# EAGLE board Clock_BUS (EAGLE 9.3.2)
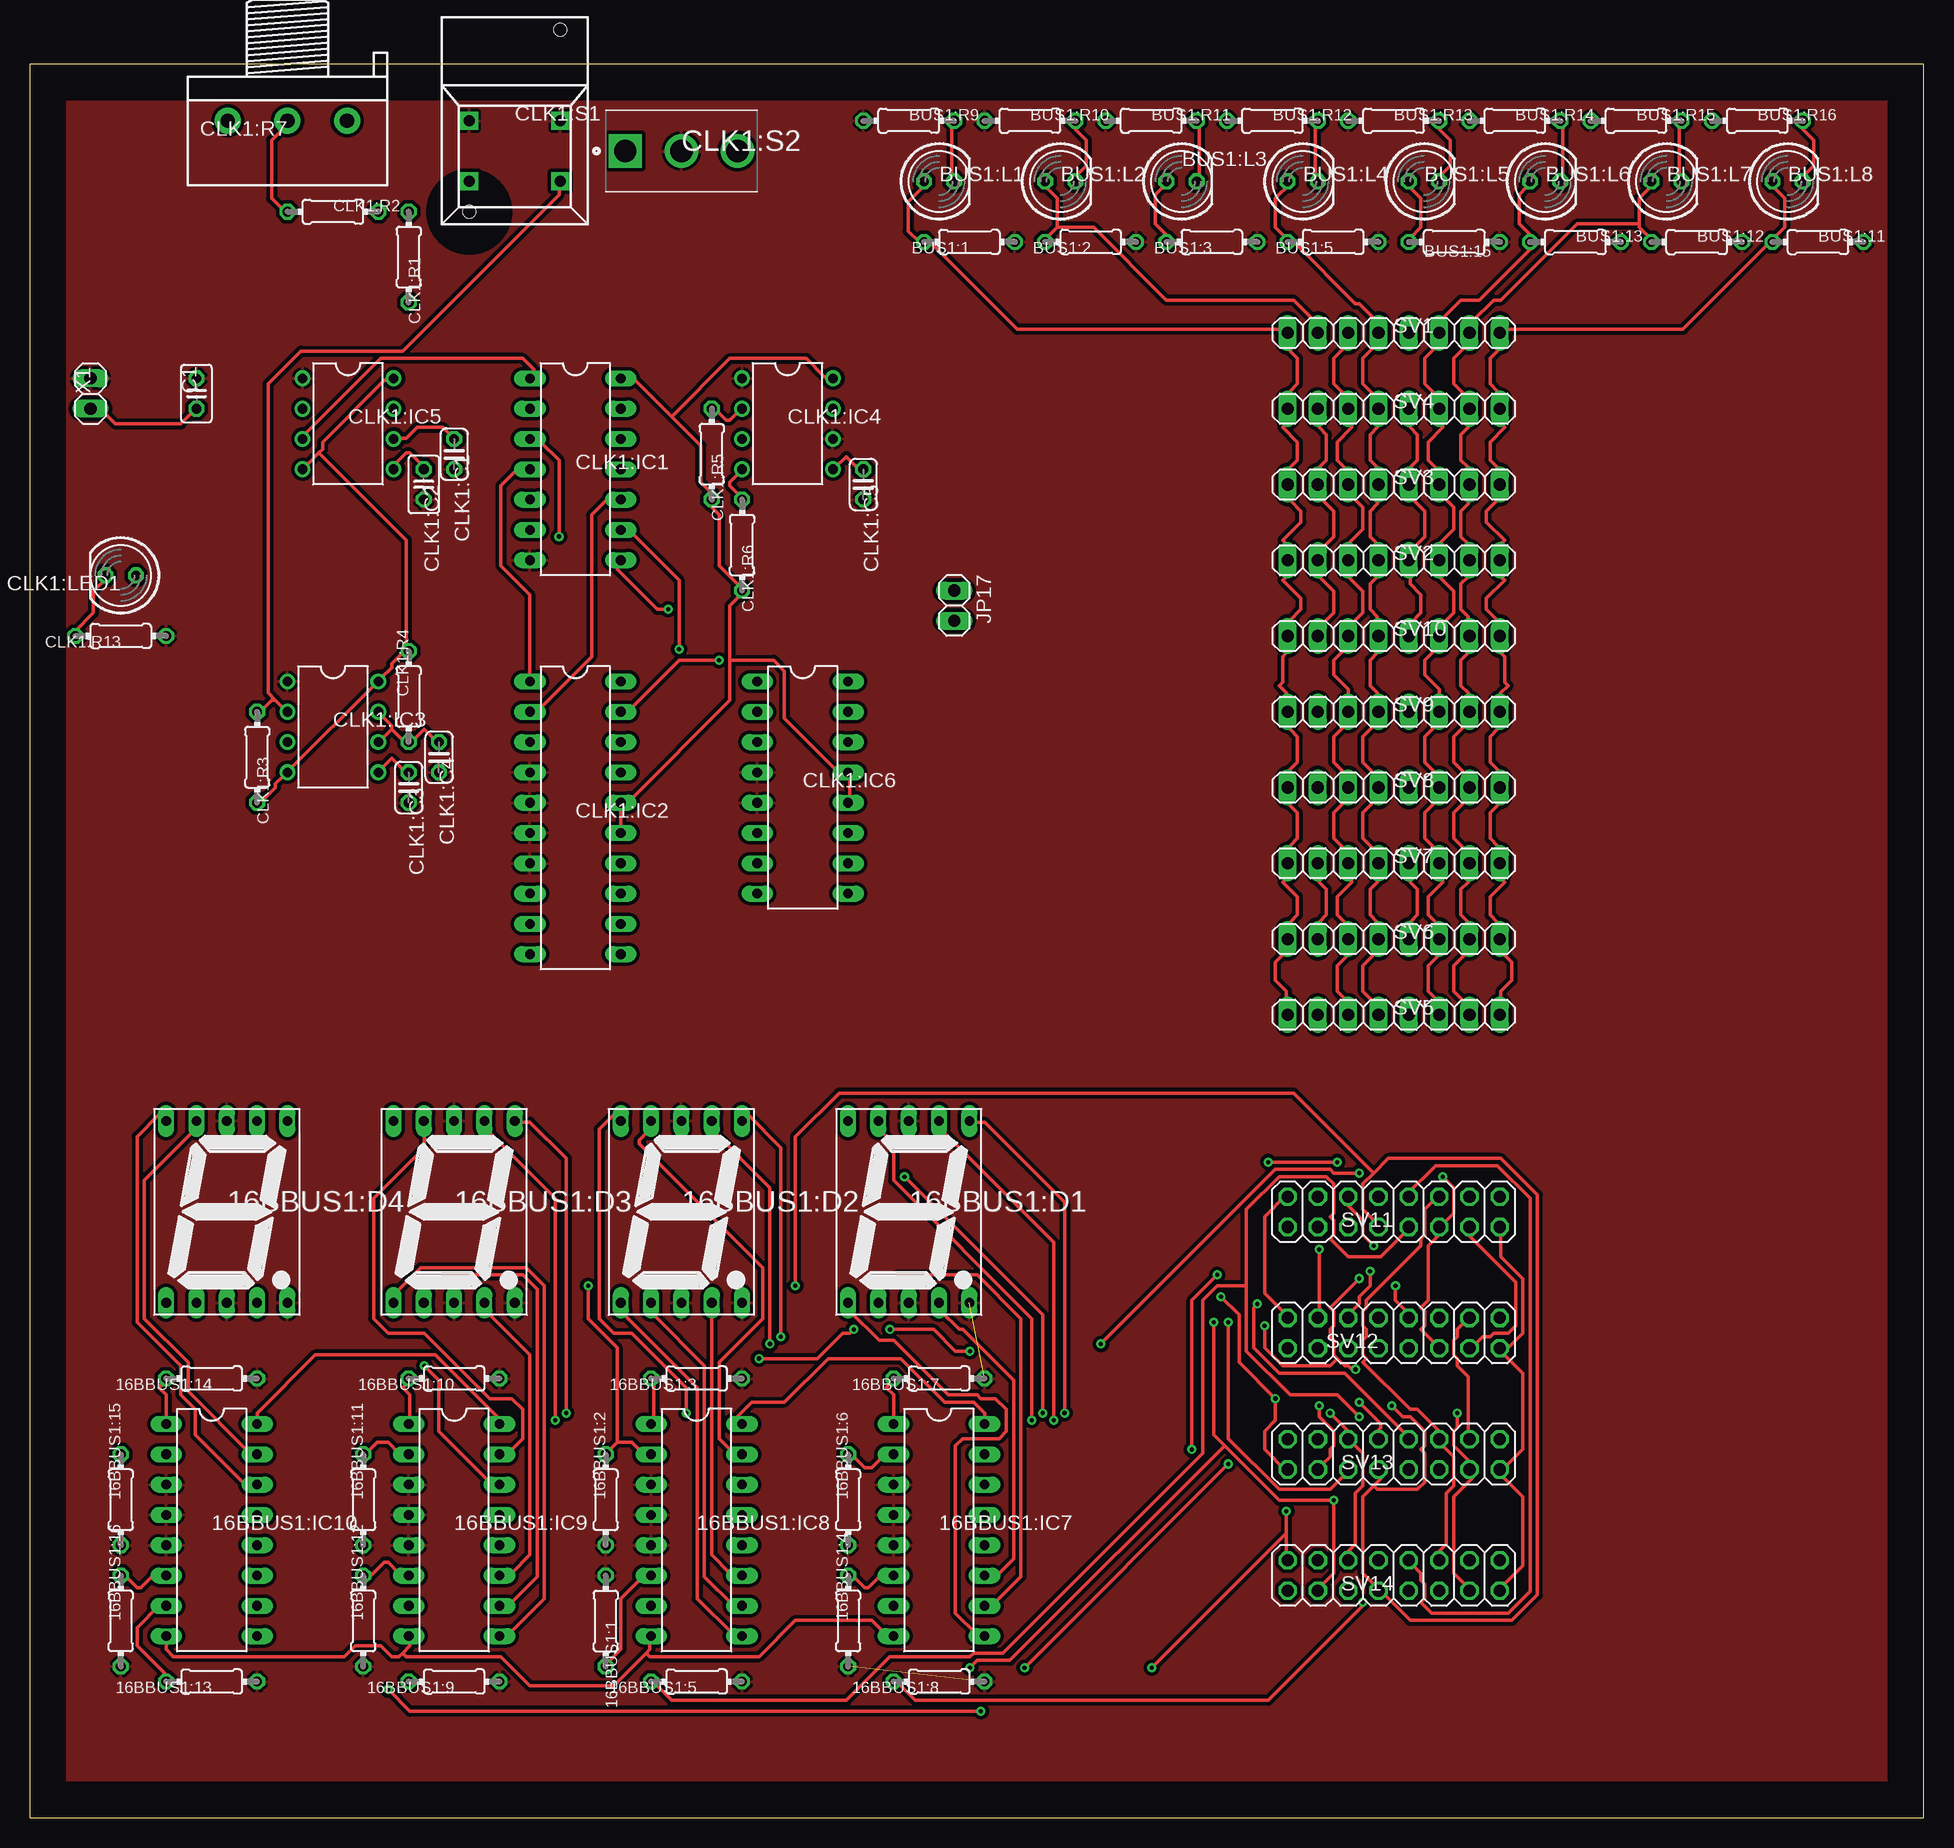
[diagram p0: board, top side]
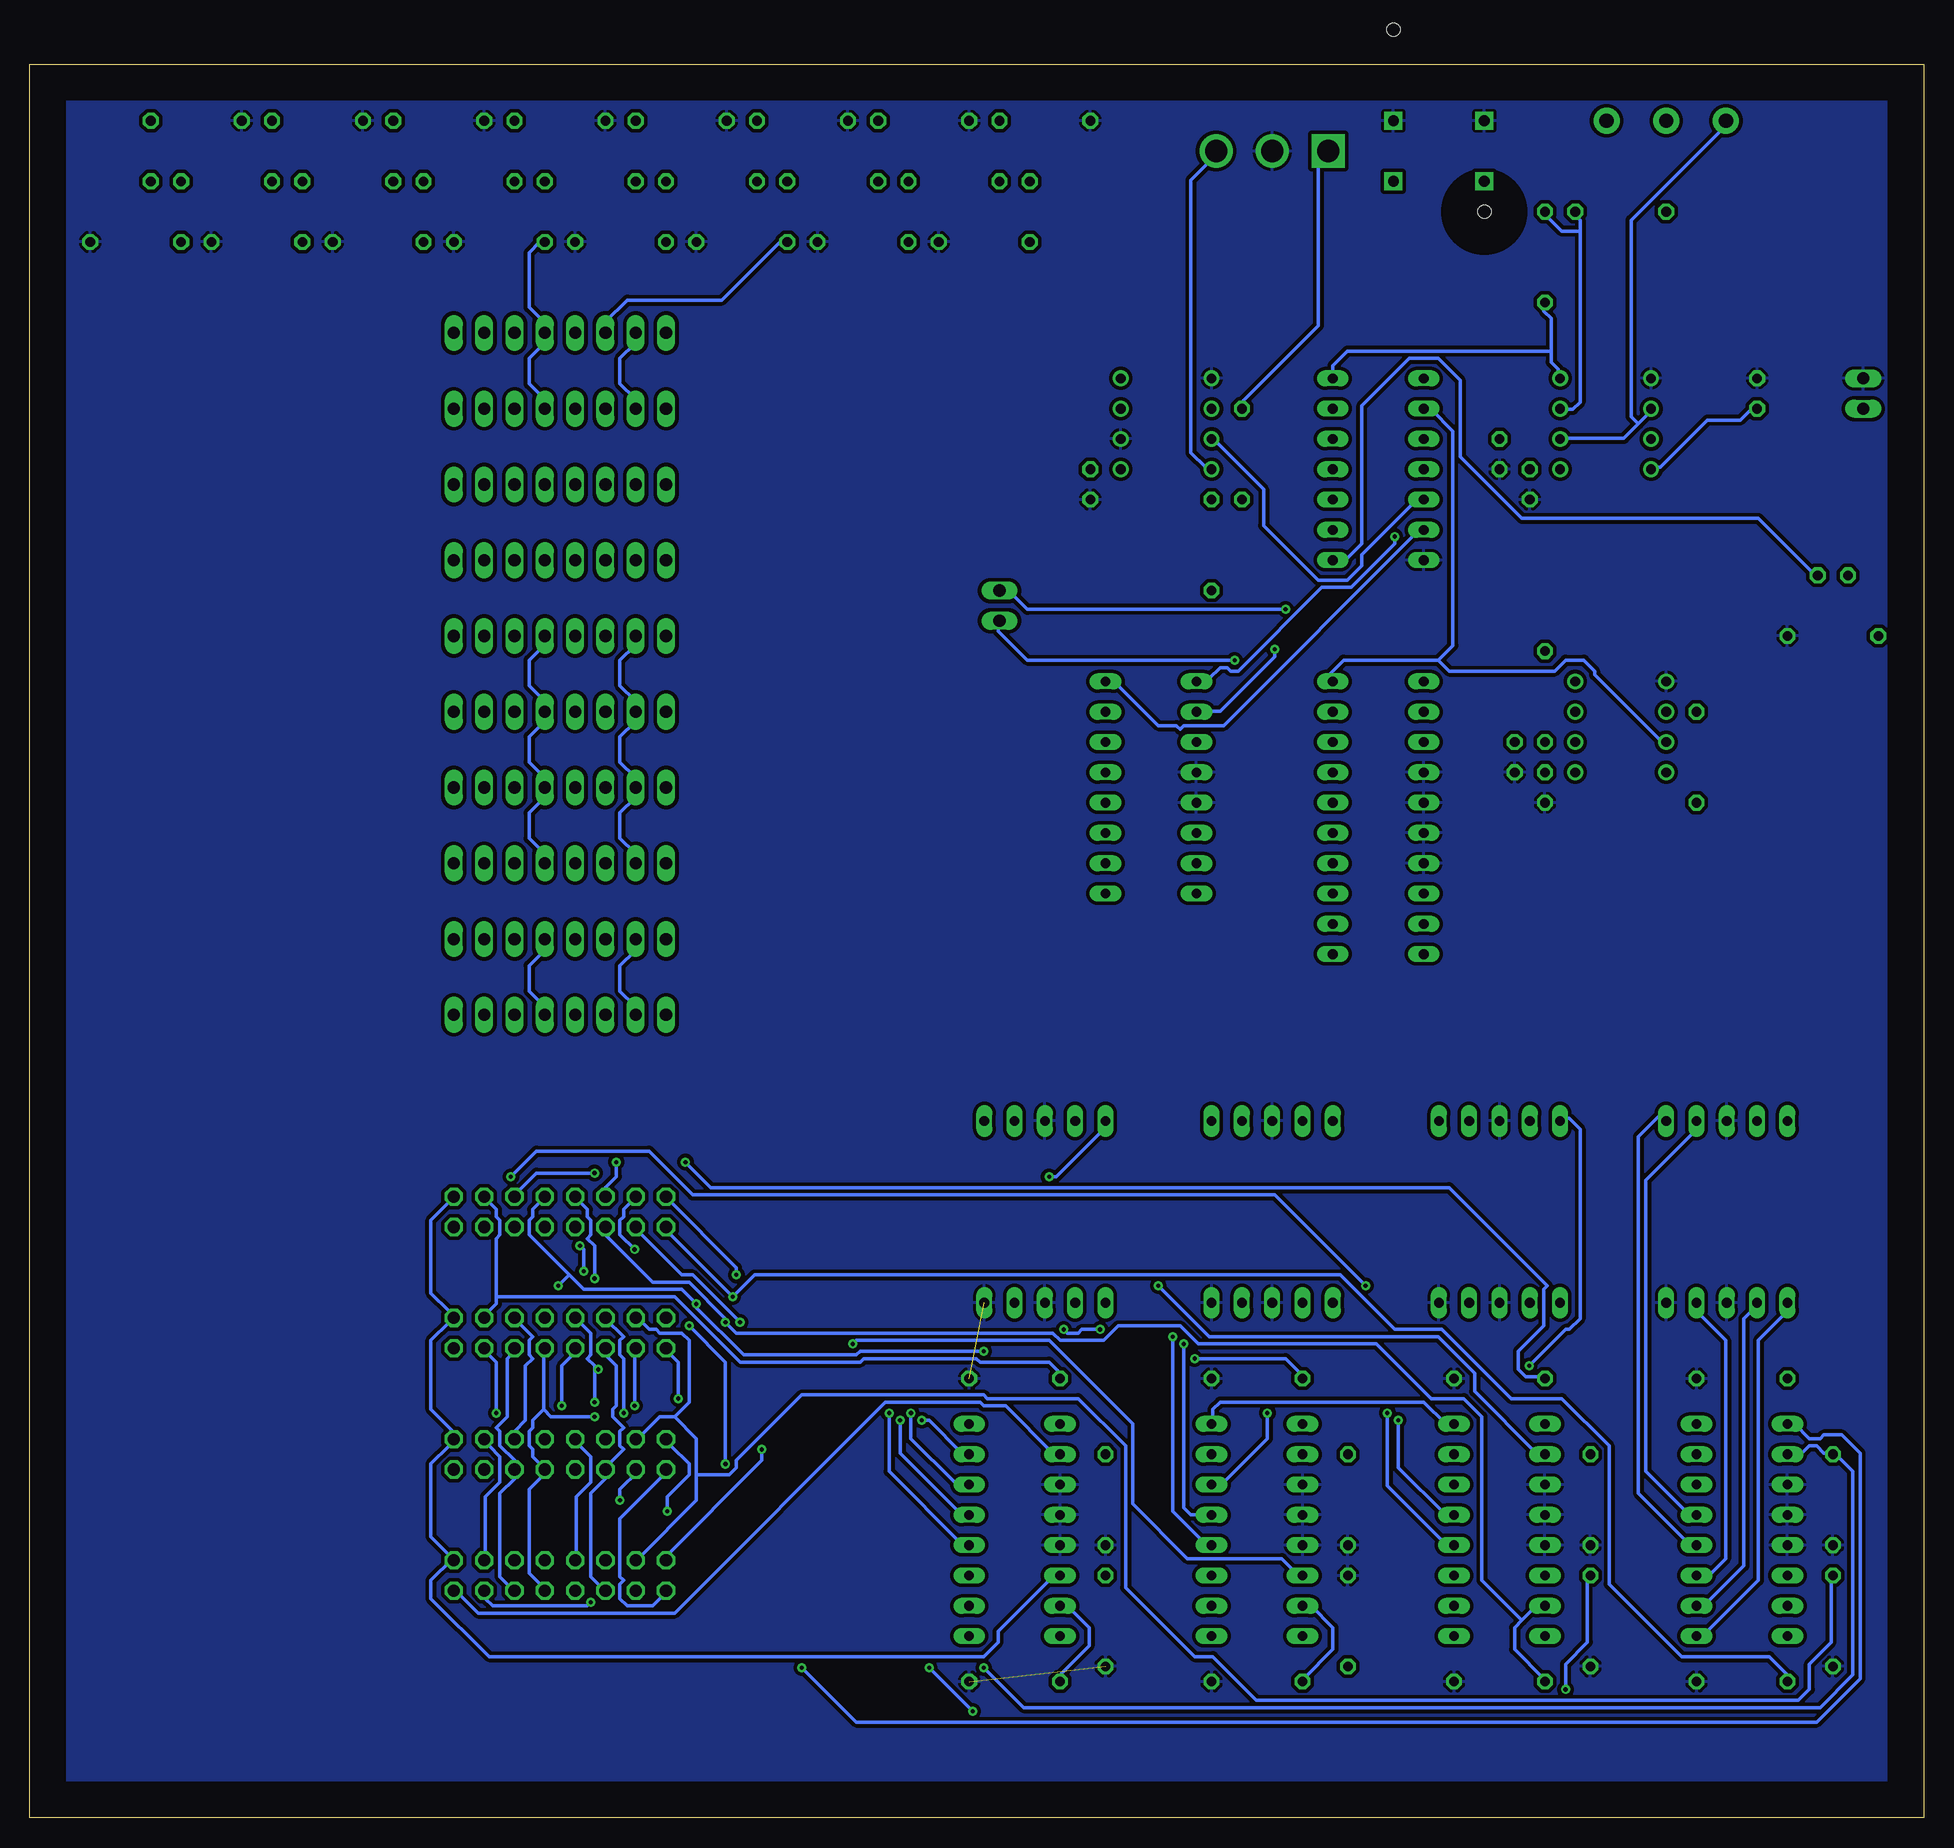
[diagram p1: board, bottom side, seen from below]

Size 158.73 x 146.99 mm. Coordinates in mm from the lower left corner, seen from the top.
Outline: 0,0 158.73,0 158.73,146.99 0,146.99 0,0
Copper layers (1*16): Top 0.035mm / dielectric 1.5mm / Bottom 0.035mm
Design rules "Endustriyel": minimum track width 12mil, minimum drill 0.35mm, track to track 12mil, track to pad 12mil, pad to pad 12mil, via to via 12mil, smd to smd 6mil, copper to edge 120mil, drill to drill 12mil, minimum pad ring 10mil, minimum via ring 8mil, stop-mask expansion 4mil, vias tented up to drill 0mil, thermal gap 10mil
Net classes: 0 default: width 0.254 mm

## Footprints (pad centres in the part's own frame; a part is rotated, then mirrored left to right if it is on the bottom)
0204/7 = drill 0.813 octagon: 1 -3.81,0; 2 3.81,0
7SEG-13 = drill 0.813 long: 1 -5.08,-7.62; 2 -2.54,-7.62; 3 0,-7.62; 4 2.54,-7.62; 5 5.08,-7.62; 6 5.08,7.62; 7 2.54,7.62; 8 0,7.62; 9 -2.54,7.62; 10 -5.08,7.62
DIL16 = drill 0.813 long: 1 -8.89,-3.81; 2 -6.35,-3.81; 3 -3.81,-3.81; 4 -1.27,-3.81; 5 1.27,-3.81; 6 3.81,-3.81; 7 6.35,-3.81; 8 8.89,-3.81; 9 8.89,3.81; 10 6.35,3.81; 11 3.81,3.81; 12 1.27,3.81; 13 -1.27,3.81; 14 -3.81,3.81; 15 -6.35,3.81; 16 -8.89,3.81
LED5MM = drill 0.813 octagon: A -1.27,0; K 1.27,0
C025-025X050 = drill 0.813 octagon: 1 -1.27,0; 2 1.27,0
C025-024X044 = drill 0.813 octagon: 1 -1.27,0; 2 1.27,0
DIL14 = drill 0.813 long: 1 -7.62,-3.81; 2 -5.08,-3.81; 3 -2.54,-3.81; 4 0,-3.81; 5 2.54,-3.81; 6 5.08,-3.81; 7 7.62,-3.81; 8 7.62,3.81; 9 5.08,3.81; 10 2.54,3.81; 11 0,3.81; 12 -2.54,3.81; 13 -5.08,3.81; 14 -7.62,3.81
DIL20 = drill 0.813 long: 1 -11.43,-3.81; 2 -8.89,-3.81; 3 -6.35,-3.81; 4 -3.81,-3.81; 5 -1.27,-3.81; 6 1.27,-3.81; 7 3.81,-3.81; 8 6.35,-3.81; 9 8.89,-3.81; 10 11.43,-3.81; 11 11.43,3.81; 12 8.89,3.81; 13 6.35,3.81; 14 3.81,3.81; 15 1.27,3.81; 16 -1.27,3.81; 17 -3.81,3.81; 18 -6.35,3.81; 19 -8.89,3.81; 20 -11.43,3.81
DIL08 = drill 0.813 pad 1.27: 1 -3.81,-3.81; 2 -1.27,-3.81; 3 1.27,-3.81; 4 3.81,-3.81; 5 3.81,3.81; 6 1.27,3.81; 7 -1.27,3.81; 8 -3.81,3.81
POT = drill 1.2 pad 2.184: 1 -5,0; 2 0,0; 3 5,0
5501 = drill 0.9 pad 1.5 square: 1A 0,3.81; 1B 0,-3.81; NC 5.08,-3.81; NO 5.08,3.81 | hole 1.1: -7.62,3.81; 7.62,-3.81
TE_4-1825136-5 = drill 1.854 square: 1 -4.699,0 | drill 1.854: 2 0,0; 3 4.699,0
1X02 = drill 1.016 long: 1 -1.27,0; 2 1.27,0
1X08 = drill 1.016 long: 1 -8.89,0; 2 -6.35,0; 3 -3.81,0; 4 -1.27,0; 5 1.27,0; 6 3.81,0; 7 6.35,0; 8 8.89,0
2X08 = drill 1.016 octagon: 1 -8.89,-1.27; 2 -8.89,1.27; 3 -6.35,-1.27; 4 -6.35,1.27; 5 -3.81,-1.27; 6 -3.81,1.27; 7 -1.27,-1.27; 8 -1.27,1.27; 9 1.27,-1.27; 10 1.27,1.27; 11 3.81,-1.27; 12 3.81,1.27; 13 6.35,-1.27; 14 6.35,1.27; 15 8.89,-1.27; 16 8.89,1.27

## Placement (x,y rotation side)
16BBUS1:1  10k  [0204/7]  48.26,16.51 270 top
16BBUS1:2  10k  [0204/7]  48.26,26.67 90 top
16BBUS1:3  10k  [0204/7]  55.88,36.83 180 top
16BBUS1:4  10k  [0204/7]  68.58,16.51 90 top
16BBUS1:5  10k  [0204/7]  55.88,11.43 180 top
16BBUS1:6  10k  [0204/7]  68.58,26.67 90 top
16BBUS1:7  10k  [0204/7]  76.2,36.83 180 top
16BBUS1:8  10k  [0204/7]  76.2,11.43 180 top
16BBUS1:9  10k  [0204/7]  35.56,11.43 180 top
16BBUS1:10  10k  [0204/7]  35.56,36.83 180 top
16BBUS1:11  10k  [0204/7]  27.94,26.67 90 top
16BBUS1:12  10k  [0204/7]  27.94,16.51 90 top
16BBUS1:13  10k  [0204/7]  15.24,11.43 180 top
16BBUS1:14  10k  [0204/7]  15.24,36.83 180 top
16BBUS1:15  10k  [0204/7]  7.62,26.67 90 top
16BBUS1:16  10k  [0204/7]  7.62,16.51 90 top
16BBUS1:D1  [7SEG-13]  73.66,50.8 0 top
16BBUS1:D2  [7SEG-13]  54.61,50.8 0 top
16BBUS1:D3  [7SEG-13]  35.56,50.8 0 top
16BBUS1:D4  [7SEG-13]  16.51,50.8 0 top
16BBUS1:IC7  74LS47N  [DIL16]  76.2,24.13 270 top
16BBUS1:IC8  74LS47N  [DIL16]  55.88,24.13 270 top
16BBUS1:IC9  74LS47N  [DIL16]  35.56,24.13 270 top
16BBUS1:IC10  74LS47N  [DIL16]  15.24,24.13 270 top
BUS1:1  10k  [0204/7]  78.74,132.08 180 top
BUS1:2  10k  [0204/7]  88.9,132.08 180 top
BUS1:3  10k  [0204/7]  99.06,132.08 180 top
BUS1:5  10k  [0204/7]  109.22,132.08 180 top
BUS1:11  10k  [0204/7]  149.86,132.08 0 top
BUS1:12  10k  [0204/7]  139.7,132.08 0 top
BUS1:13  10k  [0204/7]  129.54,132.08 0 top
BUS1:15  10k  [0204/7]  119.38,132.08 0 top
BUS1:L1  [LED5MM]  76.2,137.16 0 top
BUS1:L2  [LED5MM]  86.36,137.16 0 top
BUS1:L3  [LED5MM]  96.52,137.16 0 top
BUS1:L4  [LED5MM]  106.68,137.16 0 top
BUS1:L5  [LED5MM]  116.84,137.16 0 top
BUS1:L6  [LED5MM]  127,137.16 0 top
BUS1:L7  [LED5MM]  137.16,137.16 0 top
BUS1:L8  [LED5MM]  147.32,137.16 0 top
BUS1:R9  220  [0204/7]  73.66,142.24 0 top
BUS1:R10  220  [0204/7]  83.82,142.24 0 top
BUS1:R11  220  [0204/7]  93.98,142.24 0 top
BUS1:R12  220  [0204/7]  104.14,142.24 0 top
BUS1:R13  220  [0204/7]  114.3,142.24 0 top
BUS1:R14  220  [0204/7]  124.46,142.24 0 top
BUS1:R15  220  [0204/7]  134.62,142.24 0 top
BUS1:R16  220  [0204/7]  144.78,142.24 0 top
C1  330uf  [C025-025X050]  13.97,119.38 90 top
CLK1:C1  1uf  [C025-024X044]  35.56,114.3 270 top
CLK1:C2  0.01uF  [C025-025X050]  33.02,111.76 270 top
CLK1:C3  0.01uF  [C025-024X044]  31.75,86.36 270 top
CLK1:C4  0.1uf  [C025-024X044]  34.29,88.9 270 top
CLK1:C5  0.01uF  [C025-024X044]  69.85,111.76 270 top
CLK1:IC1  74ALS09N  [DIL14]  45.72,113.03 270 top
CLK1:IC2  74AC11004  [DIL20]  45.72,83.82 270 top
CLK1:IC3  LM555N  [DIL08]  25.4,91.44 270 top
CLK1:IC4  LM555N  [DIL08]  63.5,116.84 270 top
CLK1:IC5  LM555N  [DIL08]  26.67,116.84 270 top
CLK1:IC6  74AC11032  [DIL16]  64.77,86.36 270 top
CLK1:LED1  [LED5MM]  7.62,104.14 180 top
CLK1:R1  1k  [0204/7]  31.75,130.81 270 top
CLK1:R2  1k  [0204/7]  25.4,134.62 0 top
CLK1:R3  1k  [0204/7]  19.05,88.9 270 top
CLK1:R4  1k  [0204/7]  31.75,93.98 90 top
CLK1:R5  1k  [0204/7]  57.15,114.3 270 top
CLK1:R6  1k  [0204/7]  59.69,106.68 270 top
CLK1:R7  [POT]  21.59,142.24 180 top
CLK1:R13  220  [0204/7]  7.62,99.06 180 top
CLK1:S1  5501  [5501]  40.64,142.24 270 top
CLK1:S2  [TE_4-1825136-5]  54.61,139.7 0 top
JP17  [1X02]  77.47,101.6 270 top
SV1  [1X08]  114.3,124.46 0 top
SV2  [1X08]  114.3,105.41 0 top
SV3  [1X08]  114.3,111.76 0 top
SV4  [1X08]  114.3,118.11 0 top
SV5  [1X08]  114.3,67.31 0 top
SV6  [1X08]  114.3,73.66 0 top
SV7  [1X08]  114.3,80.01 0 top
SV8  [1X08]  114.3,86.36 0 top
SV9  [1X08]  114.3,92.71 0 top
SV10  [1X08]  114.3,99.06 0 top
SV11  [2X08]  114.3,50.8 180 top
SV12  [2X08]  114.3,40.64 180 top
SV13  [2X08]  114.3,30.48 180 top
SV14  [2X08]  114.3,20.32 180 top
X1  [1X02]  5.08,119.38 90 top

## Library data of the parts
16BBUS1:1-16BBUS1:16 BUS1:1-BUS1:3 BUS1:5 BUS1:11-BUS1:13 BUS1:15 BUS1:R9-BUS1:R16 CLK1:R1-CLK1:R6 CLK1:R13 = rcl; SPICEPREFIX: R
16BBUS1:D1-16BBUS1:D4 = special
16BBUS1:IC7-16BBUS1:IC10 CLK1:IC1 = 74xx-eu
BUS1:L1-BUS1:L8 CLK1:LED1 = led
C1 CLK1:C1-CLK1:C5 = rcl; SPICEPREFIX: C
CLK1:IC2 CLK1:IC6 = 74ac-logic
CLK1:IC3-CLK1:IC5 = linear
CLK1:R7 = 555
CLK1:S1 = switch
CLK1:S2 = 4-1825136-5
JP17 = pinhead
SV1-SV14 = pinhead; OC_FARNELL: unknown; OC_NEWARK: unknown
X1 = pinhead; MPN: 237-102; OC_FARNELL: unknown; OC_NEWARK: 70K9898

## Nets
16BBUS1:N$9: 16BBUS1:D1.7 16BBUS1:IC7.13
16BBUS1:N$10: 16BBUS1:D1.6 16BBUS1:IC7.12
16BBUS1:N$11: 16BBUS1:D1.4 16BBUS1:IC7.11
16BBUS1:N$12: 16BBUS1:D1.2 16BBUS1:IC7.10
16BBUS1:N$13: 16BBUS1:D1.1 16BBUS1:IC7.9
16BBUS1:N$14: 16BBUS1:D1.9 16BBUS1:IC7.15
16BBUS1:N$15: 16BBUS1:D1.10 16BBUS1:IC7.14
16BBUS1:N$16: 16BBUS1:D2.7 16BBUS1:IC8.13
16BBUS1:N$17: 16BBUS1:D4.7 16BBUS1:IC10.13
16BBUS1:N$18: 16BBUS1:D4.6 16BBUS1:IC10.12
16BBUS1:N$19: 16BBUS1:D4.4 16BBUS1:IC10.11
16BBUS1:N$20: 16BBUS1:D4.2 16BBUS1:IC10.10
16BBUS1:N$21: 16BBUS1:D2.6 16BBUS1:IC8.12
16BBUS1:N$22: 16BBUS1:D2.4 16BBUS1:IC8.11
16BBUS1:N$23: 16BBUS1:D2.2 16BBUS1:IC8.10
16BBUS1:N$24: 16BBUS1:D2.1 16BBUS1:IC8.9
16BBUS1:N$25: 16BBUS1:D4.1 16BBUS1:IC10.9
16BBUS1:N$26: 16BBUS1:D4.9 16BBUS1:IC10.15
16BBUS1:N$27: 16BBUS1:D4.10 16BBUS1:IC10.14
16BBUS1:N$29: 16BBUS1:D2.9 16BBUS1:IC8.15
16BBUS1:N$30: 16BBUS1:D2.10 16BBUS1:IC8.14
16BBUS1:N$31: 16BBUS1:D3.7 16BBUS1:IC9.13
16BBUS1:N$32: 16BBUS1:D3.6 16BBUS1:IC9.12
16BBUS1:N$33: 16BBUS1:D3.4 16BBUS1:IC9.11
16BBUS1:N$34: 16BBUS1:D3.2 16BBUS1:IC9.10
16BBUS1:N$35: 16BBUS1:D3.1 16BBUS1:IC9.9
16BBUS1:N$36: 16BBUS1:D3.9 16BBUS1:IC9.15
16BBUS1:N$37: 16BBUS1:D3.10 16BBUS1:IC9.14
16BBUS1:VCC: 16BBUS1:IC7.16 16BBUS1:IC8.16 16BBUS1:IC9.16 16BBUS1:IC10.16
BUS1:N$38: BUS1:L1.K BUS1:R9.2
BUS1:N$39: BUS1:L2.K BUS1:R10.2
BUS1:N$40: BUS1:L3.K BUS1:R11.2
BUS1:N$41: BUS1:L4.K BUS1:R12.2
BUS1:N$42: BUS1:L5.K BUS1:R13.2
BUS1:N$43: BUS1:L6.K BUS1:R14.2
BUS1:N$44: BUS1:L7.K BUS1:R15.2
BUS1:N$45: BUS1:L8.K BUS1:R16.2
CLK: CLK1:IC1.8 CLK1:LED1.A JP17.1
CLK1:ACLK: CLK1:IC1.1 CLK1:IC5.3
CLK1:AMS: CLK1:IC1.5 CLK1:IC4.3
CLK1:MCLK: CLK1:IC1.2 CLK1:IC2.20 CLK1:IC3.3
CLK1:N$1: CLK1:IC4.2 CLK1:R5.1 CLK1:S2.1
CLK1:N$2: CLK1:IC3.2 CLK1:R3.1 CLK1:S1.NO
CLK1:N$3: CLK1:IC4.4 CLK1:R6.1 CLK1:S2.3
CLK1:N$4: CLK1:C3.1 CLK1:IC3.5
CLK1:N$5: CLK1:C5.1 CLK1:IC4.5
CLK1:N$6: CLK1:LED1.K CLK1:R13.2
CLK1:N$7: CLK1:C4.1 CLK1:IC3.6 CLK1:IC3.7 CLK1:R4.1
CLK1:N$8: CLK1:IC1.10 CLK1:IC2.2
CLK1:N$9: CLK1:IC5.7 CLK1:R1.1 CLK1:R2.2
CLK1:N$10: CLK1:C2.1 CLK1:IC5.5
CLK1:N$11: CLK1:R2.1 CLK1:R7.2
CLK1:N$12: CLK1:IC1.6 CLK1:IC6.16
CLK1:N$13: CLK1:IC1.3 CLK1:IC6.1
CLK1:N$14: CLK1:IC1.9 CLK1:IC6.2
CLK1:N$17: CLK1:IC1.4 CLK1:IC2.1
CLK1:NC: CLK1:IC4.7
CLK1:TRIGGER: CLK1:C1.1 CLK1:IC5.2 CLK1:IC5.6 CLK1:R7.3
GND: 16BBUS1:1.1 16BBUS1:2.1 16BBUS1:3.1 16BBUS1:4.1 16BBUS1:5.1 16BBUS1:6.1 16BBUS1:7.1 16BBUS1:8.1 16BBUS1:9.1 16BBUS1:10.1 16BBUS1:11.1 16BBUS1:12.1 16BBUS1:13.1 16BBUS1:14.1 16BBUS1:15.1 16BBUS1:16.1 16BBUS1:D1.3 16BBUS1:D1.5 16BBUS1:D1.8 16BBUS1:D2.3 16BBUS1:D2.5 16BBUS1:D2.8 16BBUS1:D3.3 16BBUS1:D3.5 16BBUS1:D3.8 16BBUS1:D4.3 16BBUS1:D4.5 16BBUS1:D4.8 16BBUS1:IC7.3 16BBUS1:IC7.4 16BBUS1:IC7.5 16BBUS1:IC8.3 16BBUS1:IC8.4 16BBUS1:IC8.5 16BBUS1:IC9.3 16BBUS1:IC9.4 16BBUS1:IC9.5 16BBUS1:IC10.3 16BBUS1:IC10.4 16BBUS1:IC10.5 BUS1:1.1 BUS1:2.1 BUS1:3.1 BUS1:5.1 BUS1:11.2 BUS1:12.2 BUS1:13.2 BUS1:15.2 BUS1:R9.1 BUS1:R10.1 BUS1:R11.1 BUS1:R12.1 BUS1:R13.1 BUS1:R14.1 BUS1:R15.1 BUS1:R16.1 C1.2 CLK1:C1.2 CLK1:C2.2 CLK1:C3.2 CLK1:C4.2 CLK1:C5.2 CLK1:IC1.7 CLK1:IC2.4 CLK1:IC2.5 CLK1:IC2.6 CLK1:IC2.7 CLK1:IC3.1 CLK1:IC4.1 CLK1:IC4.6 CLK1:IC5.1 CLK1:IC6.4 CLK1:IC6.5 CLK1:R13.1 CLK1:S1.1A CLK1:S1.1B CLK1:S2.2 X1.2
HLT: CLK1:IC2.19 JP17.2
N$38: BUS1:1.2 BUS1:L1.A SV1.1 SV2.1 SV3.1 SV4.1 SV5.1 SV6.1 SV7.1 SV8.1 SV9.1 SV10.1
N$39: BUS1:2.2 BUS1:L2.A SV1.2 SV2.2 SV3.2 SV4.2 SV5.2 SV6.2 SV7.2 SV8.2 SV9.2 SV10.2
N$40: BUS1:3.2 BUS1:L3.A SV1.3 SV2.3 SV3.3 SV4.3 SV5.3 SV6.3 SV7.3 SV8.3 SV9.3 SV10.3
N$41: BUS1:5.2 BUS1:L4.A SV1.4 SV2.4 SV3.4 SV4.4 SV5.4 SV6.4 SV7.4 SV8.4 SV9.4 SV10.4
N$42: BUS1:15.1 BUS1:L5.A SV1.5 SV2.5 SV3.5 SV4.5 SV5.5 SV6.5 SV7.5 SV8.5 SV9.5 SV10.5
N$43: BUS1:13.1 BUS1:L6.A SV1.6 SV2.6 SV3.6 SV4.6 SV5.6 SV6.6 SV7.6 SV8.6 SV9.6 SV10.6
N$44: BUS1:12.1 BUS1:L7.A SV1.7 SV2.7 SV3.7 SV4.7 SV5.7 SV6.7 SV7.7 SV8.7 SV9.7 SV10.7
N$45: BUS1:11.1 BUS1:L8.A SV1.8 SV2.8 SV3.8 SV4.8 SV5.8 SV6.8 SV7.8 SV8.8 SV9.8 SV10.8
N$46: 16BBUS1:4.2 16BBUS1:IC7.6 SV11.1 SV12.1 SV13.1 SV14.1
N$47: 16BBUS1:6.2 16BBUS1:IC7.2 SV11.2 SV12.2 SV13.2 SV14.2
N$48: 16BBUS1:7.2 16BBUS1:IC7.1 SV11.3 SV12.3 SV13.3 SV14.3
N$49: 16BBUS1:8.2 16BBUS1:IC7.7 SV11.4 SV12.4 SV13.4 SV14.4
N$50: 16BBUS1:1.2 16BBUS1:IC8.6 SV11.5 SV12.5 SV13.5 SV14.5
N$51: 16BBUS1:2.2 16BBUS1:IC8.2 SV11.6 SV12.6 SV13.6 SV14.6
N$52: 16BBUS1:3.2 16BBUS1:IC8.1 SV11.7 SV12.7 SV13.7 SV14.7
N$53: 16BBUS1:5.2 16BBUS1:IC8.7 SV11.8 SV12.8 SV13.8 SV14.8
N$54: 16BBUS1:12.2 16BBUS1:IC9.6 SV11.9 SV12.9 SV13.9 SV14.9
N$55: 16BBUS1:11.2 16BBUS1:IC9.2 SV11.10 SV12.10 SV13.10 SV14.10
N$56: 16BBUS1:10.2 16BBUS1:IC9.1 SV11.11 SV12.11 SV13.11 SV14.11
N$57: 16BBUS1:9.2 16BBUS1:IC9.7 SV11.12 SV12.12 SV13.12 SV14.12
N$58: 16BBUS1:16.2 16BBUS1:IC10.6 SV11.13 SV12.13 SV13.13 SV14.13
N$59: 16BBUS1:15.2 16BBUS1:IC10.2 SV11.14 SV12.14 SV13.14 SV14.14
N$60: 16BBUS1:14.2 16BBUS1:IC10.1 SV11.15 SV12.15 SV13.15 SV14.15
N$61: 16BBUS1:13.2 16BBUS1:IC10.7 SV11.16 SV12.16 SV13.16 SV14.16
N$78: 16BBUS1:IC7.8 16BBUS1:IC8.8 16BBUS1:IC9.8 16BBUS1:IC10.8
VCC: C1.1 CLK1:IC1.14 CLK1:IC2.15 CLK1:IC2.16 CLK1:IC3.4 CLK1:IC3.8 CLK1:IC4.8 CLK1:IC5.4 CLK1:IC5.8 CLK1:IC6.12 CLK1:IC6.13 CLK1:R1.2 CLK1:R3.2 CLK1:R4.2 CLK1:R5.2 CLK1:R6.2 X1.1

## Tracks (layer width: path | path; a pad name or v marks a point on that pad's centre or on a via)
16BBUS1:N$9  (via drill 0.35)
  Top 0.305: v85.8,33.33 85.8,48.26 76.35,57.71 76.35,58.32 16BBUS1:D1.7
  Bottom 0.305: 16BBUS1:IC7.13 80.62,25.4 85.8,30.58 v85.8,33.33
16BBUS1:N$10  (via drill 0.35)
  Top 0.305: v86.72,33.93 86.72,51.61 80.01,58.32 78.79,58.32 16BBUS1:D1.6
  Bottom 0.305: v86.72,33.93 86.72,29.06 80.62,22.96 80.01,22.96 16BBUS1:IC7.12
16BBUS1:N$11
  Top 0.305: 16BBUS1:IC7.11 80.01,20.52 81.23,20.52 82.45,21.74 82.45,36.68 78.18,40.95 77.88,40.95 76.35,42.47 76.35,43.08 16BBUS1:D1.4
16BBUS1:N$12
  Top 0.305: 16BBUS1:IC7.10 80.62,17.78 83.06,20.22 83.06,41.86 79.4,45.52 72.69,45.52 71.17,43.99 71.17,43.38 16BBUS1:D1.2
16BBUS1:N$13
  Top 0.305: 16BBUS1:IC7.9 80.01,15.34 79.4,15.34 77.57,17.17 77.57,31.19 78.18,31.8 81.23,31.8 81.84,32.41 81.84,34.24 80.92,35.15 79.7,35.15 79.4,35.46 76.96,35.46 72.39,40.03 71.17,40.03 68.73,42.47 68.73,43.08 16BBUS1:D1.1
16BBUS1:N$14  (via drill 0.35)
  Top 0.305: v83.97,33.33 83.97,41.86 72.39,53.44 72.39,56.49 71.17,57.71 71.17,58.32 16BBUS1:D1.9
  Bottom 0.305: v83.97,33.33 83.36,33.33 80.62,30.58 80.01,30.58 16BBUS1:IC7.15
16BBUS1:N$15  (via drill 0.35)
  Top 0.305: v84.89,33.93 84.89,42.16 v73.3,53.75
  Bottom 0.305: v84.89,33.93 84.89,31.8 81.23,28.14 80.01,28.14 16BBUS1:IC7.14 | v73.3,53.75 72.69,53.75 68.73,57.71 68.73,58.32 16BBUS1:D1.10
16BBUS1:N$16  (via drill 0.35)
  Top 0.305: v62.03,39.73 62.03,52.83 57.15,57.71 16BBUS1:D2.7
  Bottom 0.305: 16BBUS1:IC8.13 61.42,25.4 62.03,26.01 v62.03,39.73
16BBUS1:N$17
  Bottom 0.305: 16BBUS1:IC10.13 19.66,25.4 23.32,29.06 23.32,53.44 19.05,57.71 16BBUS1:D4.7
16BBUS1:N$18
  Bottom 0.305: 16BBUS1:IC10.12 19.05,22.96 19.66,22.96 23.93,27.23 23.93,57.1 22.1,58.93 21.79,58.93 21.49,58.62 16BBUS1:D4.6
16BBUS1:N$19
  Bottom 0.305: 16BBUS1:D4.4 19.05,42.47 16.61,40.03 16.61,21.74 17.83,20.52 19.05,20.52 16BBUS1:IC10.11
16BBUS1:N$20
  Bottom 0.305: 16BBUS1:IC10.10 18.44,17.78 15.09,21.13 15.09,41.86 13.87,43.08 16BBUS1:D4.2
16BBUS1:N$21  (via drill 0.35)
  Top 0.305: v62.94,40.34 62.94,56.19 60.2,58.93 59.89,58.93 59.59,58.62 16BBUS1:D2.6
  Bottom 0.305: v62.94,40.34 62.94,25.7 60.2,22.96 59.89,22.96 16BBUS1:IC8.12
16BBUS1:N$22
  Top 0.305: 16BBUS1:D2.4 57.15,22.05 58.67,20.52 59.59,20.52 16BBUS1:IC8.11
16BBUS1:N$23
  Top 0.305: 16BBUS1:IC8.10 58.98,17.78 56.54,20.22 56.54,37.9 52.27,42.16 52.27,43.08 16BBUS1:D2.2
16BBUS1:N$24
  Top 0.305: 16BBUS1:D2.1 49.53,42.47 55.93,36.07 55.93,18.39 58.98,15.34 59.59,15.34 16BBUS1:IC8.9
16BBUS1:N$25
  Bottom 0.305: 16BBUS1:D4.1 11.43,42.47 13.87,40.03 13.87,19.91 18.44,15.34 19.05,15.34 16BBUS1:IC10.9
16BBUS1:N$26
  Top 0.305: 16BBUS1:IC10.15 19.05,30.58 18.44,30.58 13.26,35.76 13.26,38.2 9.6,41.86 9.6,53.44 13.87,57.71 13.87,58.32 16BBUS1:D4.9
16BBUS1:N$27
  Top 0.305: 16BBUS1:IC10.14 19.05,28.14 17.83,28.14 13.87,32.11 13.87,34.24 12.65,35.46 12.65,37.9 8.99,41.55 8.99,57.1 10.82,58.93 11.12,58.93 11.43,58.62 16BBUS1:D4.10
16BBUS1:N$29
  Top 0.305: 16BBUS1:IC8.15 59.59,30.58 58.98,30.58 57.76,31.8 57.76,38.2 61.42,41.86 61.42,46.13 51.05,56.49 51.05,56.79 51.97,57.71 51.97,58.32 16BBUS1:D2.9
16BBUS1:N$30  (via drill 0.35)
  Top 0.305: v55.02,33.93 55.02,36.07 50.44,40.64 48.92,40.64 47.7,41.86 47.7,57.71 48.92,58.93 49.22,58.93 49.53,58.62 16BBUS1:D2.10
  Bottom 0.305: v55.02,33.93 55.02,31.8 58.67,28.14 59.59,28.14 16BBUS1:IC8.14
16BBUS1:N$31  (via drill 0.35)
  Top 0.305: v44.04,33.33 44.04,51.92 38.25,57.71 38.25,58.32 16BBUS1:D3.7
  Bottom 0.305: 16BBUS1:IC9.13 40.08,25.4 44.04,29.36 v44.04,33.33
16BBUS1:N$32  (via drill 0.35)
  Top 0.305: v44.96,33.93 44.96,55.27 41.91,58.32 40.69,58.32 16BBUS1:D3.6
  Bottom 0.305: v44.96,33.93 44.96,27.84 40.08,22.96 39.47,22.96 16BBUS1:IC9.12
16BBUS1:N$33
  Top 0.305: 16BBUS1:IC9.11 39.47,20.52 40.39,20.52 41.91,22.05 41.91,38.81 38.25,42.47 38.25,43.08 16BBUS1:D3.4
16BBUS1:N$34
  Top 0.305: 16BBUS1:IC9.10 40.08,17.78 42.52,20.22 42.52,44.3 41.3,45.52 34.59,45.52 33.07,43.99 33.07,43.38 16BBUS1:D3.2
16BBUS1:N$35
  Top 0.305: 16BBUS1:IC9.9 39.47,15.34 40.08,15.34 43.13,18.39 43.13,44.6 41.6,46.13 32.77,46.13 30.63,43.99 30.63,43.38 16BBUS1:D3.1
16BBUS1:N$36
  Top 0.305: 16BBUS1:IC9.15 39.47,30.58 40.08,30.58 41.3,31.8 41.3,34.24 40.39,35.15 38.56,35.15 33.07,40.64 30.02,40.64 28.8,41.86 28.8,51.92 33.07,56.19 33.07,58.32 16BBUS1:D3.9
16BBUS1:N$37  (via drill 0.35)
  Top 0.305: v33.07,37.9 34.29,36.68 34.29,32.41 38.56,28.14 39.17,28.14 16BBUS1:IC9.14
  Bottom 0.305: v33.07,37.9 30.02,40.95 29.72,40.95 28.8,41.86 28.8,57.71 29.72,58.62 30.33,58.62 16BBUS1:D3.10
16BBUS1:VCC
  Top 0.305: 16BBUS1:IC10.16 19.05,33.93 23.93,38.81 33.98,38.81 39.17,33.63 39.17,33.02 16BBUS1:IC9.16 | 16BBUS1:IC7.16 80.01,33.93 79.1,34.85 76.66,34.85 73,38.51 66.9,38.51 63.25,34.85 60.5,34.85 59.28,33.63 59.28,33.33 59.59,33.02 16BBUS1:IC8.16
  Bottom 0.305: 16BBUS1:IC9.16 40.08,33.02 41.91,34.85 58.98,34.85 59.59,34.24 59.59,33.02 16BBUS1:IC8.16
BUS1:N$38
  Top 0.305: BUS1:L1.K 77.27,137.26 77.27,142.14 BUS1:R9.2
BUS1:N$39
  Top 0.305: BUS1:L2.K 87.63,137.57 88.54,138.48 88.54,140.61 87.63,141.53 BUS1:R10.2
BUS1:N$40
  Top 0.305: BUS1:L3.K 97.99,137.26 97.99,142.14 BUS1:R11.2
BUS1:N$41
  Top 0.305: BUS1:L4.K 107.75,137.26 107.75,142.14 BUS1:R12.2
BUS1:N$42
  Top 0.305: BUS1:L5.K 118.11,137.57 119.02,138.48 119.02,140.61 118.11,141.53 BUS1:R13.2
BUS1:N$43
  Top 0.305: BUS1:L6.K 128.47,137.26 128.47,142.14 BUS1:R14.2
BUS1:N$44
  Top 0.305: BUS1:L7.K 138.23,137.26 138.23,142.14 BUS1:R15.2
BUS1:N$45
  Top 0.305: BUS1:L8.K 148.59,137.57 149.5,138.48 149.5,140.61 148.59,141.53 BUS1:R16.2
CLK  (via drill 0.35)
  Top 0.305: v53.49,101.3 52.58,101.3 49.22,104.65 49.22,104.95 49.53,105.26 CLK1:IC1.8
  Bottom 0.305: CLK1:LED1.A 8.99,104.34 9.3,104.34 13.87,108.92 33.68,108.92 38.86,114.1 38.86,120.5 40.69,122.33 43.13,122.33 47.09,118.36 47.09,106.78 48.31,105.56 49.53,105.56 CLK1:IC1.8 | v53.49,101.3 75.13,101.3 76.66,102.82 77.27,102.82 JP17.1
CLK1:ACLK
  Top 0.305: CLK1:IC5.3 23.01,115.62 23.01,115.93 29.41,122.33 41.3,122.33 42.21,121.41 42.21,121.11 41.91,120.8 CLK1:IC1.1
CLK1:AMS
  Bottom 0.305: CLK1:IC1.5 41.91,110.44 42.52,110.44 47.09,105.87 47.09,104.95 48.31,103.73 50.75,103.73 55.32,108.31 55.32,111.35 59.59,115.62 CLK1:IC4.3
CLK1:MCLK
  Bottom 0.305: 40.69,97.03 39.78,96.11 30.94,96.11 30.02,97.03 28.5,97.03 27.58,96.11 27.58,95.81 22.1,90.32 21.79,90.32 CLK1:IC3.3 | 40.69,97.03 48.62,97.03 49.84,95.81 49.84,95.5 49.53,95.2 CLK1:IC2.20 | 40.69,97.03 39.47,98.25 39.47,116.23 41.3,118.06 41.91,118.06 CLK1:IC1.2
CLK1:N$1
  Top 0.305: CLK1:R5.1 57.15,118.06 57.45,118.06 58.37,117.14 58.67,117.14 59.28,117.75 59.28,118.06 59.59,118.36 CLK1:IC4.2
  Bottom 0.305: CLK1:R5.1 57.15,118.67 50.75,125.07 50.75,139.09 50.14,139.7 CLK1:S2.1
CLK1:N$2
  Top 0.305: 20.57,93.67 20.27,93.67 19.36,92.76 19.05,92.76 CLK1:R3.1 | 20.57,93.67 21.18,93.07 21.49,93.07 21.79,92.76 CLK1:IC3.2 | 20.57,93.67 19.96,94.28 19.96,120.19 22.71,122.94 31.24,122.94 44.35,136.04 44.35,136.96 CLK1:S1.NO
CLK1:N$3
  Top 0.305: CLK1:R6.1 59.59,110.74 58.67,111.66 58.67,111.96 59.28,112.57 59.28,112.88 59.59,113.18 CLK1:IC4.4
  Bottom 0.305: CLK1:IC4.4 59.89,113.18 60.2,113.18 61.42,114.4 61.42,137.26 59.59,139.09 59.59,139.7 CLK1:S2.3
CLK1:N$4
  Top 0.305: CLK1:IC3.5 29.41,87.88 30.33,88.8 31.24,87.88 31.24,87.58 31.55,87.58 CLK1:C3.1
CLK1:N$5
  Top 0.305: CLK1:IC4.5 67.51,113.18 68.43,114.1 69.65,112.88 CLK1:C5.1
CLK1:N$6
  Top 0.305: CLK1:R13.2 3.81,99.47 5.33,100.99 5.33,102.82 6.55,104.04 CLK1:LED1.K
CLK1:N$7
  Top 0.305: 30.33,91.24 29.41,90.32 CLK1:IC3.6 | 30.33,91.24 31.55,90.02 CLK1:R4.1 31.85,90.02 33.07,91.24 33.98,90.32 34.29,90.32 CLK1:C4.1 | 30.33,91.24 30.33,91.54 29.41,92.46 CLK1:IC3.7
CLK1:N$8
  Top 0.305: CLK1:IC2.2 41.91,92.76 42.52,92.76 47.09,97.33 47.09,109.22 48.31,110.44 49.53,110.44 CLK1:IC1.10
CLK1:N$9
  Bottom 0.305: 28.8,132.99 28.8,133.91 29.41,134.52 CLK1:R2.2 | 28.8,132.99 28.8,118.67 29.41,118.06 30.33,118.06 CLK1:IC5.7 | 28.8,132.99 30.33,132.99 31.55,134.21 31.55,134.52 CLK1:R1.1
CLK1:N$10
  Top 0.305: CLK1:IC5.5 30.63,113.18 30.63,113.49 31.55,114.4 31.85,114.4 33.07,113.18 CLK1:C2.1
CLK1:N$11
  Top 0.305: CLK1:R2.1 21.49,134.82 21.18,134.82 20.27,135.74 20.27,140.61 21.79,142.14 CLK1:R7.2
CLK1:N$12
  Bottom 0.305: CLK1:IC1.6 41.91,107.7 42.52,107.7 58.67,91.54 62.03,91.54 62.33,91.24 62.64,91.54 64.16,91.54 67.82,95.2 68.43,95.2 CLK1:IC6.16
CLK1:N$13  (via drill 0.35)
  Top 0.305: v44.35,107.39 44.35,113.79 42.82,115.32 41.91,115.32 CLK1:IC1.3
  Bottom 0.305: v44.35,107.39 44.35,106.78 48.01,103.12 50.44,103.12 57.45,96.11 58.06,96.11 58.37,96.42 58.98,96.42 59.89,95.5 60.81,95.5 CLK1:IC6.1
CLK1:N$14  (via drill 0.35)
  Top 0.305: v54.41,97.94 54.41,103.73 50.44,107.7 49.53,107.7 CLK1:IC1.9
  Bottom 0.305: v54.41,97.94 54.41,97.33 58.98,92.76 60.81,92.76 CLK1:IC6.2
CLK1:N$17
  Top 0.305: CLK1:IC2.1 41.91,102.51 39.47,104.95 39.47,111.66 40.69,112.88 41.91,112.88 CLK1:IC1.4
CLK1:TRIGGER
  Top 0.305: CLK1:C1.1 34.59,116.53 32.46,116.53 31.55,115.62 30.63,115.62 CLK1:IC5.6
  Bottom 0.305: 23.93,116.84 25.15,115.62 30.33,115.62 CLK1:IC5.6 | 23.93,116.84 23.01,117.75 23.01,118.06 CLK1:IC5.2 | 23.93,116.84 24.54,117.45 24.54,133.91 16.61,141.83 16.61,142.14 CLK1:R7.3
GND  (2 unrouted)
  pour Top: -2.54,149.86 -2.54,-5.08 161.29,-5.08 161.29,149.86
  pour Bottom: -7.62,153.67 -7.62,-7.62 163.83,-7.62 163.83,151.13 161.29,153.67
HLT  (via drill 0.35)
  Top 0.305: v57.76,97.03 54.41,97.03 50.14,92.76 49.53,92.76 CLK1:IC2.19
  Bottom 0.305: v57.76,97.03 75.13,97.03 77.57,99.47 77.57,100.08 JP17.2
N$38
  Top 0.305: SV5.1 105.31,67.46 105.31,69.29 104.39,70.21 104.39,71.73 105.31,72.64 105.31,73.56 SV6.1 105.61,73.86 105.61,75.08 106.22,75.69 106.22,77.22 105,78.44 105.31,78.74 105.31,79.96 SV7.1 105.61,80.26 105.61,81.48 106.22,82.09 106.22,84.23 105.61,84.84 105.61,86.36 | 105.61,86.36 105.61,87.88 106.22,88.49 106.22,90.63 105.61,91.24 105.61,92.46 SV9.1 105.31,92.76 105.31,94.28 104.7,94.89 105,95.2 105,97.33 105.31,97.64 105.31,98.86 SV10.1 105.61,99.16 105.61,100.38 106.53,101.3 106.53,102.21 105,103.73 105.31,104.04 105.31,105.26 SV2.1 105.31,105.56 105.31,106.78 105,107.09 106.53,108.61 106.53,109.53 105.61,110.44 105.61,111.66 SV3.1 105.61,111.96 105.61,113.18 106.22,113.79 106.22,115.32 105,116.53 105.31,116.84 105.31,118.06 SV4.1 105.61,118.36 105.61,119.58 106.22,120.19 106.22,122.33 105.61,122.94 105.61,124.46 SV1.1 105.31,124.46 105,124.77 82.75,124.77 75.44,132.08 BUS1:1.2 74.52,132.08 73.61,132.99 73.61,135.43 75.13,136.96 BUS1:L1.A | 105.61,86.36 SV8.1
N$39
  Top 0.305: SV7.2 108.05,79.96 108.05,78.44 108.66,77.83 108.66,75.69 108.05,75.08 108.05,73.86 SV6.2 | 86.11,133.3 85.19,132.38 85.19,132.08 BUS1:2.2 | 86.11,133.3 86.11,135.74 84.89,136.96 BUS1:L2.A | SV4.2 108.05,118.06 108.05,116.53 108.66,115.93 108.66,113.79 108.05,113.18 108.05,111.96 SV3.2 108.05,111.66 108.05,110.74 109.27,109.53 109.27,107.39 108.05,106.17 108.05,105.56 SV2.2 108.05,105.26 108.05,104.04 109.27,102.82 109.27,100.99 108.05,99.77 108.05,99.16 SV10.2 | 86.11,133.3 89.15,133.3 95.25,127.2 105.92,127.2 107.75,125.37 107.75,124.46 SV1.2
  Bottom 0.305: SV5.2 108.05,67.46 108.05,68.07 109.27,69.29 109.27,71.42 108.05,72.64 108.05,73.56 SV6.2 | 108.05,86.36 108.05,87.27 109.27,88.49 109.27,90.63 108.05,91.85 108.05,92.46 SV9.2 108.05,92.76 108.05,93.67 109.27,94.89 109.27,97.03 108.05,98.25 108.05,98.86 SV10.2 | 108.05,86.36 108.05,85.45 109.27,84.23 109.27,82.09 108.05,80.87 108.05,80.26 SV7.2 | 108.05,86.36 SV8.2 | SV1.2 108.05,124.46 108.05,123.55 109.27,122.33 109.27,120.19 108.05,118.97 108.05,118.36 SV4.2
N$40
  Top 0.305: SV5.3 110.49,68.38 109.58,69.29 109.58,71.42 110.49,72.34 SV6.3 110.49,74.78 109.58,75.69 109.58,77.22 110.8,78.44 110.8,79.65 110.49,79.96 SV7.3 110.49,80.87 109.27,82.09 109.27,84.23 110.49,85.45 SV8.3 110.49,87.27 109.27,88.49 109.27,90.63 110.49,91.85 SV9.3 110.49,94.59 109.27,95.81 109.27,97.03 110.49,98.25 SV10.3 110.49,99.77 111.71,100.99 111.71,102.82 110.49,104.04 SV2.3 110.49,106.78 111.71,108 111.71,109.83 110.49,111.05 SV3.3 110.49,112.88 109.58,113.79 109.58,115.32 110.8,116.53 110.8,117.75 110.49,118.06 SV4.3 110.49,118.97 109.27,120.19 109.27,122.33 110.49,123.55 SV1.3 | BUS1:3.2 95.25,132.69 94.34,133.6 94.34,136.04 94.94,136.65 94.94,136.96 95.25,137.26 BUS1:L3.A
  Bottom 0.305: BUS1:3.2 95.86,132.08 100.74,127.2 108.66,127.2 110.49,125.37 SV1.3
N$41
  Top 0.305: SV5.4 112.93,67.46 112.93,68.07 111.71,69.29 111.71,71.42 112.93,72.64 112.93,73.56 SV6.4 112.93,73.86 112.93,75.08 112.32,75.69 112.32,77.83 112.93,78.44 112.93,79.96 SV7.4 112.93,80.26 112.93,80.87 111.71,82.09 111.71,84.23 112.93,85.45 112.93,86.36 | 112.93,86.36 112.93,87.27 111.71,88.49 111.71,90.63 112.93,91.85 112.93,92.46 SV9.4 112.93,92.76 112.93,94.28 112.32,94.89 112.32,97.03 112.93,97.64 112.93,98.86 SV10.4 112.93,99.16 112.93,100.69 112.32,101.3 112.32,103.43 112.93,104.04 112.93,105.26 SV2.4 112.93,105.56 112.93,106.78 112.32,107.39 112.32,109.53 112.93,110.13 112.93,111.66 SV3.4 112.93,111.96 112.93,113.18 112.32,113.79 112.32,115.93 112.93,116.53 112.93,118.06 SV4.4 112.93,118.36 112.93,118.97 111.71,120.19 111.71,122.33 112.93,123.55 112.93,124.46 | BUS1:L4.A 105.61,136.96 104.39,135.74 104.39,133.3 105.31,132.38 105.31,132.08 BUS1:5.2 105.92,132.08 111.1,126.9 111.4,126.9 112.93,125.37 112.93,124.46 | 112.93,124.46 SV1.4 | 112.93,86.36 SV8.4
N$42
  Top 0.305: BUS1:15.1 115.67,132.08 115.67,132.38 116.59,133.3 116.59,135.74 115.37,136.96 BUS1:L5.A | SV4.5 115.67,118.06 115.67,116.53 116.28,115.93 116.28,113.79 115.67,113.18 115.67,111.96 SV3.5 115.67,111.66 115.67,110.74 116.89,109.53 116.89,107.39 115.67,106.17 115.67,105.56 SV2.5 115.67,105.26 115.67,103.43 116.59,102.51 116.59,100.99 115.67,100.08 115.67,99.16 SV10.5 | SV7.5 115.67,79.96 115.67,78.44 116.28,77.83 116.28,75.69 115.67,75.08 115.67,73.86 SV6.5
  Bottom 0.305: 115.67,124.46 115.67,123.55 116.89,122.33 116.89,120.19 115.67,118.97 115.67,118.36 SV4.5 | BUS1:15.1 115.98,132.08 116.89,131.17 116.89,126.59 115.67,125.37 115.67,124.46 | 115.67,124.46 SV1.5 | SV5.5 115.67,67.46 115.67,68.07 116.89,69.29 116.89,71.42 115.67,72.64 115.67,73.56 SV6.5 | 115.67,86.36 115.67,87.27 116.89,88.49 116.89,90.63 115.67,91.85 115.67,92.46 SV9.5 115.67,92.76 115.67,93.67 116.89,94.89 116.89,97.03 115.67,98.25 115.67,98.86 SV10.5 | 115.67,86.36 115.67,85.45 116.89,84.23 116.89,82.09 115.67,80.87 115.67,80.26 SV7.5 | 115.67,86.36 SV8.5
N$43
  Top 0.305: SV5.6 118.11,68.38 117.2,69.29 117.2,71.42 118.11,72.34 SV6.6 118.11,74.78 117.2,75.69 117.2,77.22 118.41,78.44 118.41,79.65 118.11,79.96 SV7.6 118.11,80.87 116.89,82.09 116.89,84.23 118.11,85.45 SV8.6 118.11,87.27 116.89,88.49 116.89,90.63 118.11,91.85 SV9.6 118.11,94.59 116.89,95.81 116.89,97.03 118.11,98.25 SV10.6 118.11,99.77 119.33,100.99 119.33,102.82 118.11,104.04 SV2.6 118.11,106.78 119.33,108 119.33,109.83 118.11,111.05 SV3.6 118.11,112.88 117.2,113.79 117.2,115.32 118.41,116.53 118.41,117.75 118.11,118.06 SV4.6 118.11,118.97 116.89,120.19 116.89,122.33 118.11,123.55 SV1.6 118.11,125.37 119.94,127.2 121.46,127.2 125.73,131.47 BUS1:13.1 125.73,132.69 124.82,133.6 124.82,136.04 125.43,136.65 125.43,136.96 125.73,137.26 BUS1:L6.A
N$44
  Top 0.305: SV5.7 120.55,67.46 120.55,68.07 119.33,69.29 119.33,71.42 120.55,72.64 120.55,73.56 SV6.7 120.55,73.86 120.55,75.08 119.94,75.69 119.94,77.83 120.55,78.44 120.55,79.96 SV7.7 120.55,80.26 120.55,80.87 119.33,82.09 119.33,84.23 120.55,85.45 120.55,86.36 | 120.55,86.36 120.55,87.27 119.33,88.49 119.33,90.63 120.55,91.85 120.55,92.46 SV9.7 120.55,92.76 120.55,94.28 119.94,94.89 119.94,97.03 120.55,97.64 120.55,98.86 SV10.7 120.55,99.16 120.55,100.69 119.94,101.3 119.94,103.43 120.55,104.04 120.55,105.26 SV2.7 120.55,105.56 120.55,106.78 119.94,107.39 119.94,109.53 120.55,110.13 120.55,111.66 SV3.7 120.55,111.96 120.55,113.18 119.94,113.79 119.94,115.93 120.55,116.53 120.55,118.06 SV4.7 120.55,118.36 120.55,118.97 119.33,120.19 119.33,122.33 120.55,123.55 120.55,124.46 SV1.7 120.85,124.46 120.85,125.37 122.68,127.2 123.29,127.2 129.69,133.6 134.87,133.6 | 134.87,133.6 134.87,135.74 136.09,136.96 BUS1:L7.A | 134.87,133.6 134.87,133.3 135.79,132.38 135.79,132.08 BUS1:12.1 | 120.55,86.36 SV8.7
N$45
  Top 0.305: SV5.8 123.29,67.46 123.29,69.29 124.21,70.21 124.21,71.73 123.29,72.64 123.29,73.56 SV6.8 122.99,73.86 122.99,75.08 122.38,75.69 122.38,77.22 123.6,78.44 123.29,78.74 123.29,79.96 SV7.8 122.99,80.26 122.99,81.48 122.38,82.09 122.38,84.23 122.99,84.84 122.99,86.36 | 122.99,86.36 122.99,87.88 122.38,88.49 122.38,90.63 122.99,91.24 122.99,92.46 SV9.8 123.29,92.76 123.29,94.28 123.9,94.89 123.6,95.2 123.6,97.33 123.29,97.64 123.29,98.86 SV10.8 122.99,99.16 122.99,100.38 122.07,101.3 122.07,102.21 123.6,103.73 123.29,104.04 123.29,105.26 SV2.8 123.29,105.56 123.29,106.78 123.6,107.09 122.07,108.61 122.07,109.53 122.99,110.44 122.99,111.66 SV3.8 122.99,111.96 122.99,113.18 122.38,113.79 122.38,115.32 123.6,116.53 123.29,116.84 123.29,118.06 SV4.8 122.99,118.36 122.99,119.58 122.38,120.19 122.38,122.33 122.99,122.94 122.99,124.46 SV1.8 123.29,124.46 123.6,124.77 138.53,124.77 145.85,132.08 BUS1:11.1 146.15,132.08 146.15,132.38 147.07,133.3 147.07,135.74 145.85,136.96 BUS1:L8.A | 122.99,86.36 SV8.8
N$46
  Top 0.305: 16BBUS1:4.2 68.73,20.22 69.04,20.22 69.95,19.3 70.26,19.3 71.17,20.22 72.39,20.22 16BBUS1:IC7.6
  Bottom 0.305: 123.29,21.74 125.12,23.57 125.12,29.67 123.6,31.19 123.29,31.19 122.99,31.5 SV13.1 123.29,31.8 123.29,32.41 125.12,34.24 125.12,40.03 123.6,41.55 | 123.6,41.55 123.29,41.86 SV12.1 123.6,41.55 | 123.6,41.55 123.6,42.47 125.12,43.99 125.12,50.09 123.29,51.92 SV11.1 | 123.29,21.74 125.12,19.91 125.12,18.39 120.24,13.51 78.79,13.51 77.57,14.73 77.57,15.65 73,20.22 72.39,20.22 16BBUS1:IC7.6 | 123.29,21.74 SV14.1
N$47
  Top 0.305: 16BBUS1:6.2 68.73,30.28 69.04,30.28 69.95,29.36 70.56,29.36 71.48,30.28 72.39,30.28 16BBUS1:IC7.2 | SV14.2 123.29,19.3 125.12,21.13 125.12,26.92 122.99,29.06 SV13.2 123.29,29.06 125.12,30.89 125.12,37.29 123.29,39.12 SV12.2 123.29,39.42 123.9,39.42 125.12,40.64 125.12,45.21 123.29,47.04 123.29,49.48 SV11.2
  Bottom 0.305: 16BBUS1:IC7.2 72.39,30.58 73,30.58 76.96,34.54 78.79,34.54 79.1,34.85 87.02,34.85 104.7,17.17 121.16,17.17 122.68,18.69 122.68,19 122.99,19.3 SV14.2
N$48
  Top 0.305: 16BBUS1:IC7.1 72.39,35.46 71.78,36.07 72.08,36.37 72.08,36.68 72.39,36.98 16BBUS1:7.2 | SV13.3 120.55,31.8 120.55,36.98 119.63,37.9 119.63,38.51 119.33,38.81 119.33,40.03 119.63,40.34 119.63,40.95 120.55,41.86 SV12.3
  Bottom 0.305: SV14.3 120.55,21.74 120.55,26.92 119.33,28.14 119.33,30.28 120.24,31.19 120.24,31.5 120.55,31.8 SV13.3 | 119.63,43.69 119.63,48.57 119.33,48.87 119.33,50.09 119.63,50.39 119.63,51 120.24,51.61 120.24,51.92 120.55,52.22 SV11.3 | 119.63,43.69 119.63,43.08 120.55,42.16 SV12.3 | 16BBUS1:7.2 72.39,37.29 73.3,38.2 79.1,38.2 79.4,38.51 88.85,38.51 89.15,38.2 99.21,38.2 104.7,43.69 119.63,43.69
N$49  (via drill 0.35)
  Top 0.305: SV12.4 120.85,39.42 121.77,40.34 122.38,40.34 122.68,40.64 123.9,40.64 124.51,41.25 124.51,44.91 120.55,48.87 120.55,49.48 SV11.4 | SV14.4 120.55,19.3 119.33,20.52 119.33,26.92 120.85,28.45 120.85,29.06 SV13.4 120.55,29.36 120.55,29.97 119.33,31.19 119.33,32.41 119.63,32.72 v119.63,33.93 | v111.71,18.09 111.71,17.78 103.78,9.86 74.22,9.86 72.69,11.38 72.39,11.38 16BBUS1:8.2
  Bottom 0.305: 16BBUS1:8.2 72.39,11.99 69.95,14.43 69.95,15.95 71.78,17.78 16BBUS1:IC7.7 | v111.71,18.09 112.01,17.78 119.94,17.78 120.55,18.39 120.55,19 SV14.4 | v119.63,33.93 119.63,38.2 120.55,39.12 SV12.4
N$50  (via drill 0.35)
  Top 0.305: 16BBUS1:1.2 48.31,12.9 49.53,14.12 49.53,18.39 51.36,20.22 51.97,20.22 16BBUS1:IC8.6 | SV14.5 118.11,22.35 118.72,22.96 118.72,27.23 119.33,27.84 119.33,30.28 118.41,31.19 118.41,31.5 118.11,31.8 | 118.11,31.8 118.11,32.41 116.28,34.24 115.67,34.24 111.71,38.2 112.01,38.51 111.71,38.81 111.71,40.03 112.01,40.34 112.01,40.95 111.71,41.25 111.71,42.47 112.01,42.77 112.01,43.38 116.59,47.95 116.59,48.57 116.89,48.87 116.89,51 117.8,51.92 118.11,51.92 SV11.5 | 118.11,31.8 SV13.5 | v89.76,39.73 104.39,54.36 108.97,54.36 109.27,54.05 v111.4,54.05
  Bottom 0.305: SV13.5 118.11,32.41 117.2,33.33 117.2,37.9 116.59,38.51 116.89,38.81 116.89,40.03 116.59,40.34 118.11,41.86 SV12.5 | v89.76,39.73 89.46,40.03 73.3,40.03 66.29,33.02 66.29,26.31 61.72,21.74 53.8,21.74 52.58,20.52 52.27,20.52 16BBUS1:IC8.6 | v111.4,54.05 116.28,54.05 118.11,52.22 SV11.5
N$51  (via drill 0.35)
  Top 0.305: 49.22,31.5 48.31,30.58 16BBUS1:2.2 | 49.22,31.5 50.44,31.5 51.36,30.58 51.97,30.58 16BBUS1:IC8.2 | 118.11,49.48 118.11,48.87 117.2,47.95 117.2,43.38 116.59,42.77 116.89,42.47 116.89,41.25 116.59,40.95 118.11,39.42 SV12.6 | 49.22,31.5 49.22,39.42 46.79,41.86 v46.79,44.6 | v118.41,53.75 119.33,52.83 119.33,50.7 118.11,49.48 | 118.11,49.48 SV11.6
  Bottom 0.305: SV14.6 118.11,19.3 118.41,19.3 119.33,20.22 119.33,27.23 118.11,28.45 SV13.6 118.11,29.97 119.33,31.19 119.33,32.41 119.63,32.72 118.72,33.63 118.72,38.51 118.41,38.81 118.41,39.12 118.11,39.42 SV12.6 | v46.79,44.6 54.41,52.22 103.17,52.22 106.83,55.88 116.28,55.88 v118.41,53.75
N$52  (via drill 0.35)
  Top 0.305: 16BBUS1:IC8.1 52.27,33.02 52.27,36.68 16BBUS1:3.2 | SV14.7 115.67,21.44 116.59,20.52 116.59,19.91 116.89,19.61 116.89,18.39 116.59,18.09 117.5,17.17 123.9,17.17 125.73,19 125.73,51.92 122.99,54.66 117.8,54.66 115.37,52.22 SV11.7 | v102.87,43.08 102.56,42.77 102.56,39.42 104.7,37.29 110.19,37.29 115.37,32.11 115.37,31.8 SV13.7 | v114.45,44.6 114.45,43.38 115.37,42.47 115.37,42.16 SV12.7 | v61.11,38.51 65.99,38.51 68.12,40.64 68.73,40.64 v69.04,40.95 | v72.08,40.95 75.74,40.95 77.57,39.12 v78.79,39.12
  Bottom 0.305: 113.54,45.52 116.89,48.87 116.89,50.09 116.59,50.39 116.59,51 115.98,51.61 115.67,51.61 115.37,51.92 SV11.7 | 113.54,45.52 112.32,44.3 104.09,44.3 v102.87,43.08 102.87,42.77 98.91,38.81 89.46,38.81 89.15,39.12 v78.79,39.12 | 113.54,45.52 v114.45,44.6 | v61.11,38.51 53.49,38.51 52.27,37.29 52.27,36.98 16BBUS1:3.2 | v69.04,40.95 70.56,40.95 70.87,40.64 71.78,40.64 v72.08,40.95
N$53  (via drill 0.35)
  Top 0.305: 101.96,44.6 101.96,39.12 105.61,35.46 109.58,35.46 v111.4,33.63 | 101.96,44.6 101.96,51 104.7,53.75 108.66,53.75 109.27,53.14 109.27,50.7 108.97,50.39 109.27,50.09 109.27,48.87 108.97,48.57 110.49,47.04 113.23,47.04 115.37,49.17 115.37,49.48 SV11.8 | 101.96,44.6 99.52,44.6 98.3,43.38 98.3,30.58 81.53,13.82 79.1,13.82 78.79,13.51 72.08,13.51 68.43,9.86 53.8,9.86 52.27,11.38 16BBUS1:5.2
  Bottom 0.305: 16BBUS1:IC8.7 51.36,17.78 49.53,15.95 49.53,14.12 51.97,11.68 16BBUS1:5.2 | SV14.8 115.67,19.3 116.89,20.52 116.89,27.53 115.37,29.06 SV13.8 115.37,29.36 115.67,29.67 115.98,29.67 116.59,30.28 116.59,30.89 116.89,31.19 116.89,32.41 116.59,32.72 116.59,33.33 115.67,34.24 | 115.67,34.24 115.67,39.12 SV12.8 | v111.4,33.63 115.06,33.63 115.67,34.24
N$54  (via drill 0.35)
  Top 0.305: 16BBUS1:12.2 28.19,20.22 28.5,20.22 29.72,21.44 30.02,21.44 30.94,20.52 31.55,20.52 16BBUS1:IC9.6 | v111.4,34.85 113.23,33.02 113.23,32.72 112.93,32.41 112.93,31.8 SV13.9 | v111.4,45.21 108.97,42.77 109.27,42.47 109.27,41.25 108.97,40.95 108.97,40.34 109.27,40.03 109.27,38.81 109.58,38.51 | 109.58,38.51 110.19,37.9 110.49,37.9 110.8,37.59 v111.1,37.59 | v30.02,10.77 31.85,8.94 v79.7,8.94 | v100.43,29.67 v83.36,12.6 | v103.48,41.25 103.48,39.42 105,37.9 108.97,37.9 109.58,38.51
  Bottom 0.305: SV14.9 112.93,21.74 112.93,26.92 111.71,28.14 111.71,30.28 112.62,31.19 112.62,31.5 112.93,31.8 SV13.9 | v111.4,34.85 111.4,37.59 | 111.4,37.59 111.4,37.9 112.01,38.51 111.71,38.81 111.71,40.64 112.93,41.86 SV12.9 | v111.4,45.21 111.4,47.95 112.01,48.57 111.71,48.87 111.71,50.09 112.01,50.39 112.01,51 112.93,51.92 SV11.9 | 111.4,37.59 v111.1,37.59 | v30.02,10.77 30.02,12.9 28.19,14.73 28.19,20.22 16BBUS1:12.2 | v83.36,12.6 v79.7,8.94 | v100.43,29.67 100.43,38.2 v103.48,41.25
N$55  (via drill 0.35)
  Top 0.305: 16BBUS1:11.2 28.19,30.58 29.11,31.5 30.02,31.5 30.94,30.58 31.55,30.58 16BBUS1:IC9.2 | 112.62,27.84 113.23,28.45 113.23,29.06 SV13.10 | 112.62,27.84 111.71,26.92 111.71,20.52 112.93,19.3 SV14.10 112.93,19 113.23,18.69 113.54,18.69 115.67,16.56 124.21,16.56 126.34,18.69 126.34,52.22 123.29,55.27 113.84,55.27 112.62,54.05 | v114.15,34.54 115.06,33.63 115.67,33.63 116.89,32.41 116.89,31.19 116.59,30.89 116.89,30.58 116.89,28.14 116.28,27.53 112.93,27.53 112.62,27.84 | 112.62,54.05 111.71,53.14 111.71,51 112.93,49.78 SV11.10 | v64.16,44.6 64.16,57.1 67.82,60.76 105.92,60.76 112.62,54.05
  Bottom 0.305: v114.15,34.54 114.15,37.9 113.23,38.81 113.23,39.12 SV12.10 | v64.16,44.6 59.89,40.34 40.69,40.34 37.64,37.29 37.64,35.76 32.46,30.58 31.85,30.58 16BBUS1:IC9.2
N$56  (via drill 0.35)
  Top 0.305: 16BBUS1:IC9.1 31.85,33.02 31.85,35.46 31.24,36.07 31.85,36.68 16BBUS1:10.2 | SV14.11 110.49,22.35 111.1,22.96 111.1,27.23 111.71,27.84 111.71,30.58 110.49,31.8 | v108.97,33.93 110.49,32.41 110.49,31.8 | 110.49,31.8 SV13.11 | SV11.11 110.49,51.31 111.71,50.09 111.71,48.87 v112.62,47.95 | v112.32,45.82 112.32,44.6 111.4,43.69 111.4,43.08 110.8,42.47 110.8,42.16 110.49,41.86 SV12.11 | v109.58,54.97 v103.78,54.97
  Bottom 0.305: v108.97,33.93 108.97,38.51 109.27,38.81 109.27,40.03 108.97,40.34 110.49,41.86 SV12.11 | v112.62,47.95 112.32,47.65 v112.32,45.82 | v103.78,54.97 101.65,52.83 39.78,52.83 31.55,44.6 31.85,44.3 31.85,41.25 33.98,39.12 33.98,37.59 33.38,36.98 31.85,36.98 16BBUS1:10.2 | v109.58,54.97 109.58,53.75 110.49,52.83 SV11.11
N$57  (via drill 0.35)
  Top 0.305: v100.43,41.55 100.43,31.8 104.7,27.53 108.97,27.53 110.49,29.06 SV13.12
  Bottom 0.305: 33.68,16.56 32.46,17.78 16BBUS1:IC9.7 | 33.68,16.56 34.29,15.95 34.29,14.12 31.85,11.68 16BBUS1:9.2 | SV14.12 110.49,19.3 110.8,19.3 111.71,20.22 111.71,27.23 110.49,28.45 SV13.12 110.49,29.36 108.97,30.89 109.27,31.19 109.27,32.41 108.97,32.72 109.88,33.63 109.88,34.24 109.58,34.54 109.58,37.9 110.49,38.81 SV12.12 | SV11.12 110.49,48.87 106.53,44.91 103.48,44.91 100.43,41.86 v100.43,41.55 99.52,40.64 73,40.64 72.39,40.03 68.73,40.03 67.51,41.25 62.33,41.25 60.81,39.73 45.87,39.73 41.3,35.15 38.56,35.15 37.03,33.63 37.03,19.91 33.68,16.56
N$58  (via drill 0.35)
  Top 0.305: 16BBUS1:16.2 7.77,20.22 8.08,20.22 8.99,19.3 9.3,19.3 10.21,20.22 11.43,20.22 16BBUS1:IC10.6 | v108.05,47.65 108.05,42.16 SV12.13
  Bottom 0.305: 102.87,28.75 102.87,31.8 104.7,33.63 | 102.87,28.75 102.87,26.62 107.75,21.74 SV14.13 | 104.7,33.63 105.92,33.63 107.44,32.11 107.75,32.11 108.05,31.8 SV13.13 | 104.7,33.63 103.48,34.85 103.48,40.03 104.09,40.64 105.92,40.64 106.22,40.95 106.83,40.95 107.75,41.86 SV12.13 | v108.05,47.65 109.27,48.87 109.27,50.09 108.97,50.39 108.97,51 108.05,51.92 SV11.13 | 102.87,28.75 100.13,28.75 99.52,29.36 99.52,29.97 94.03,35.46 78.79,35.46 78.49,35.15 70.87,35.15 66.9,31.19 66.9,19.3 61.11,13.51 59.59,13.51 55.93,9.86 10.52,9.86 9.6,10.77 9.6,12.9 7.77,14.73 7.77,20.22 16BBUS1:16.2
N$59  (via drill 0.35)
  Top 0.305: SV14.14 108.05,19.3 109.27,20.52 v109.27,26.62 104.7,26.62 100.13,31.19 | v108.05,34.54 108.05,33.63 109.27,32.41 109.27,31.19 108.97,30.89 108.97,30.28 108.36,29.67 108.05,29.67 107.75,29.36 SV13.14 | v99.21,41.55 99.21,32.11 100.13,31.19 | v78.79,12.6 79.4,13.21 82.14,13.21 100.13,31.19
  Bottom 0.305: 16BBUS1:IC10.2 11.43,30.58 10.21,30.58 9.6,31.19 8.99,31.19 8.38,30.58 7.77,30.58 16BBUS1:15.2 7.47,30.28 7.16,30.28 5.94,29.06 5.94,11.99 8.69,9.25 75.44,9.25 v78.79,12.6 | v109.27,26.62 109.27,27.53 107.75,29.06 SV13.14 | v108.05,34.54 108.05,39.12 SV12.14 | v99.21,41.55 103.17,45.52 104.09,45.52 107.75,49.17 107.75,49.48 SV11.14
N$60  (via drill 0.35)
  Top 0.305: SV12.15 105.31,42.16 103.48,43.99 103.48,50.39 105.31,52.22 SV11.15 | 16BBUS1:IC10.1 11.43,35.46 10.82,36.07 11.12,36.37 11.12,36.68 11.43,36.98 16BBUS1:14.2 | v105.31,25.7 105.31,23.88 | 105.31,23.88 105.31,21.74 SV14.15 | 105.31,23.88 v94.03,12.6 | v99.52,45.52 97.38,43.38 v97.38,30.89
  Bottom 0.305: v105.31,25.7 105.31,26.92 103.48,28.75 103.48,29.67 105,31.19 105,31.5 105.31,31.8 SV13.15 | 16BBUS1:IC10.1 10.82,33.02 9.6,31.8 8.69,31.8 8.38,32.11 6.86,32.11 5.33,30.58 5.33,11.68 8.99,8.03 89.46,8.03 v94.03,12.6 | v99.52,45.52 99.52,46.13 105.31,51.92 SV11.15 | v97.38,30.89 97.38,29.97 105.61,21.74 SV14.15
N$61  (via drill 0.35)
  Top 0.305: 16BBUS1:13.2 11.43,11.99 8.99,14.43 8.99,15.95 10.82,17.78 16BBUS1:IC10.7 | SV13.16 105.31,29.06 103.48,30.89 103.48,32.41 104.39,33.33 v104.39,35.15 101.35,38.2 101.35,42.16 v99.82,43.69
  Bottom 0.305: SV14.16 105.61,19 105.61,18.69 106.53,17.78 108.66,17.78 109.27,18.39 109.27,19.61 108.97,19.91 109.27,20.22 109.27,25.09 105.31,29.06 SV13.16 | v104.39,35.15 104.39,38.2 105.31,39.12 SV12.16 | SV11.16 105.31,49.48 105.31,49.17 v99.82,43.69 97.99,45.52 48.92,45.52 44.35,40.95 40.39,40.95 34.59,35.15 30.33,35.15 26.37,31.19 26.37,19.61 20.27,13.51 12.95,13.51 11.43,11.99 16BBUS1:13.2
N$78
  Top 0.305: 16BBUS1:IC10.8 11.43,14.12 12.04,13.51 26.37,13.51 27.28,14.43 29.41,14.43 30.33,13.51 30.94,13.51 31.24,13.82 | 31.24,13.82 31.85,14.43 31.85,15.04 16BBUS1:IC9.8 | 51.66,13.82 48.92,11.07 41.91,11.07 39.47,13.51 31.55,13.51 31.24,13.82 | 51.66,13.82 51.97,14.12 51.97,15.04 16BBUS1:IC8.8 | 51.66,13.82 51.97,13.51 61.11,13.51 64.16,16.56 70.56,16.56 71.78,15.34 72.39,15.34 16BBUS1:IC7.8
VCC
  Top 0.305: CLK1:IC6.12 68.73,85.14 68.73,87.58 CLK1:IC6.13 68.43,87.88 67.51,87.88 63.25,92.15 63.25,96.11 62.33,97.03 58.67,97.03 | CLK1:IC2.15 CLK1:IC2.16 49.53,85.14 50.14,85.14 58.67,93.67 58.67,97.03 | 57.15,110.44 57.15,109.83 57.76,109.22 57.76,104.95 59.59,103.12 CLK1:R6.2 59.89,102.82 58.67,101.6 58.67,97.03 | 53.8,117.45 56.24,115.01 56.24,111.96 57.45,110.74 57.15,110.44 | 53.8,117.45 50.75,120.5 49.53,120.5 CLK1:IC1.14 | 57.15,110.44 CLK1:R5.2 | 53.8,117.45 58.67,122.33 65.08,122.33 66.6,120.8 67.21,120.8 CLK1:IC4.8 | CLK1:R3.2 19.05,85.14 19.36,85.14 20.57,86.36 20.57,86.67 21.18,87.27 21.18,87.58 21.49,87.88 CLK1:IC3.4 21.79,87.88 28.8,94.89 28.8,95.2 29.11,95.5 CLK1:IC3.8 29.41,95.5 30.33,96.42 30.33,96.72 31.55,97.94 | C1.1 13.87,118.06 12.65,116.84 7.16,116.84 5.94,118.06 5.33,118.06 X1.1 | 24.23,114.4 23.32,113.49 23.01,113.49 22.71,113.18 CLK1:IC5.4 | 24.23,114.4 24.54,114.71 24.54,115.32 29.72,120.5 30.33,120.5 CLK1:IC5.8 | 31.55,97.94 31.55,107.09 24.23,114.4 | 31.55,97.94 CLK1:R4.2
  Bottom 0.305: 31.24,122.94 31.24,125.68 31.85,126.29 31.85,126.9 CLK1:R1.2 | 31.24,122.94 31.24,122.02 30.63,121.41 30.63,120.8 CLK1:IC5.8 | CLK1:IC5.4 22.71,113.18 22.1,113.18 18.14,117.14 15.39,117.14 14.17,118.36 C1.1 | CLK1:IC1.14 49.53,121.72 48.31,122.94 31.24,122.94

## Text on the board
tValues: Clock Speed | Manual Pulse | A/M Switch | 8BitBUS/Veri Yolu | Clock/Saat | 16BitBUS/Veri Yolu